# EAGLE board ltc2344-16.bu (EAGLE 9.5.1)

No outline drawn. Coordinates in mm, seen from the top.
Copper layers (1*16): Top 0.035mm / dielectric 0.15mm / Bottom 0.035mm
Design rules "default": minimum track width 6mil, minimum drill 0.35mm, track to track 6mil, track to pad 6mil, pad to pad 6mil, via to via 6mil, smd to smd 6mil, copper to edge 40mil, drill to drill 6mil, minimum pad ring 10mil, minimum via ring 8mil, stop-mask expansion 4mil, vias tented up to drill 0mil, thermal gap 10mil

## Footprints (pad centres in the part's own frame; a part is rotated, then mirrored left to right if it is on the bottom)
QFN32 = smd 0.6 x 0.3: 1 -2.3,1.75; 2 -2.3,1.25; 3 -2.3,0.75; 4 -2.3,0.25; 5 -2.3,-0.25; 6 -2.3,-0.75; 7 -2.3,-1.25; 8 -2.3,-1.75; 17 2.3,-1.75; 18 2.3,-1.25; 19 2.3,-0.75; 20 2.3,-0.25; 21 2.3,0.25; 22 2.3,0.75; 23 2.3,1.25; 24 2.3,1.75 | smd 0.3 x 0.6: 9 -1.75,-2.3; 10 -1.25,-2.3; 11 -0.75,-2.3; 12 -0.25,-2.3; 13 0.25,-2.3; 14 0.75,-2.3; 15 1.25,-2.3; 16 1.75,-2.3; 25 1.75,2.3; 26 1.25,2.3; 27 0.75,2.3; 28 0.25,2.3; 29 -0.25,2.3; 30 -0.75,2.3; 31 -1.25,2.3; 32 -1.75,2.3 | smd 3.2 x 3.2: EXP 0,0
C0402 = smd 0.7 x 0.9: 1 -0.65,0; 2 0.65,0
C0603 = smd 1.1 x 1: 1 -0.85,0; 2 0.85,0

## Placement (x,y rotation side)
ADC1  LTC2344-16  [QFN32]  -7.62,-17.78 0 top
C139  0.1uf  [C0402]  -10.16,-25.4 0 top
C140  47uf 6.3V  [C0603]  1.27,-16.51 0 top
C141  2.2uf  [C0402]  -3.81,-25.4 0 top
C142  0.1uf  [C0402]  -10.16,-30.48 0 top
C143  0.1uf  [C0402]  -3.81,-30.48 0 top

## Library data of the parts
ADC1 = wouter
C139-C143 = rcl; SPICEPREFIX: C

## Nets
+5V: ADC1.30 C142.1
/CS: ADC1.27
ADIN0_N: ADC1.7
ADIN0_P: ADC1.8
ADIN1_N: ADC1.5
ADIN1_P: ADC1.6
ADIN2_N: ADC1.3
ADIN2_P: ADC1.4
ADIN3_N: ADC1.1
ADIN3_P: ADC1.2
BUSY: ADC1.26
CNV: ADC1.15
GND [power]: ADC1.9 ADC1.11 ADC1.13 ADC1.14 ADC1.20 ADC1.29 ADC1.31 ADC1.32 ADC1.EXP C139.2 C140.2 C141.2 C142.2 C143.2
N$1: ADC1.21 C143.1
N$81: ADC1.10 C139.1
N$82: ADC1.12 C140.1
N$83: ADC1.28 C141.1
SCKI: ADC1.19
SDI: ADC1.25
SDO0: ADC1.17
SDO1: ADC1.18
SDO2: ADC1.23
SDO3: ADC1.24

## Tracks (layer width: path | path; a pad name or v marks a point on that pad's centre or on a via)
+5V  (1 unrouted)
GND  (13 unrouted)
N$1  (1 unrouted)
N$81  (1 unrouted)
N$82  (1 unrouted)
N$83  (1 unrouted)